# Altium PCB PCB1_DIO.PcbDoc
Units mil, origin at the board's own origin, x right, y up, seen from the top; angles counter-clockwise.
Board outline 2795.28 x 2007.87 mil, 2 copper layers (Top Layer, Bottom Layer); 3 components, 36 nets, 151 pads, 0 vias.
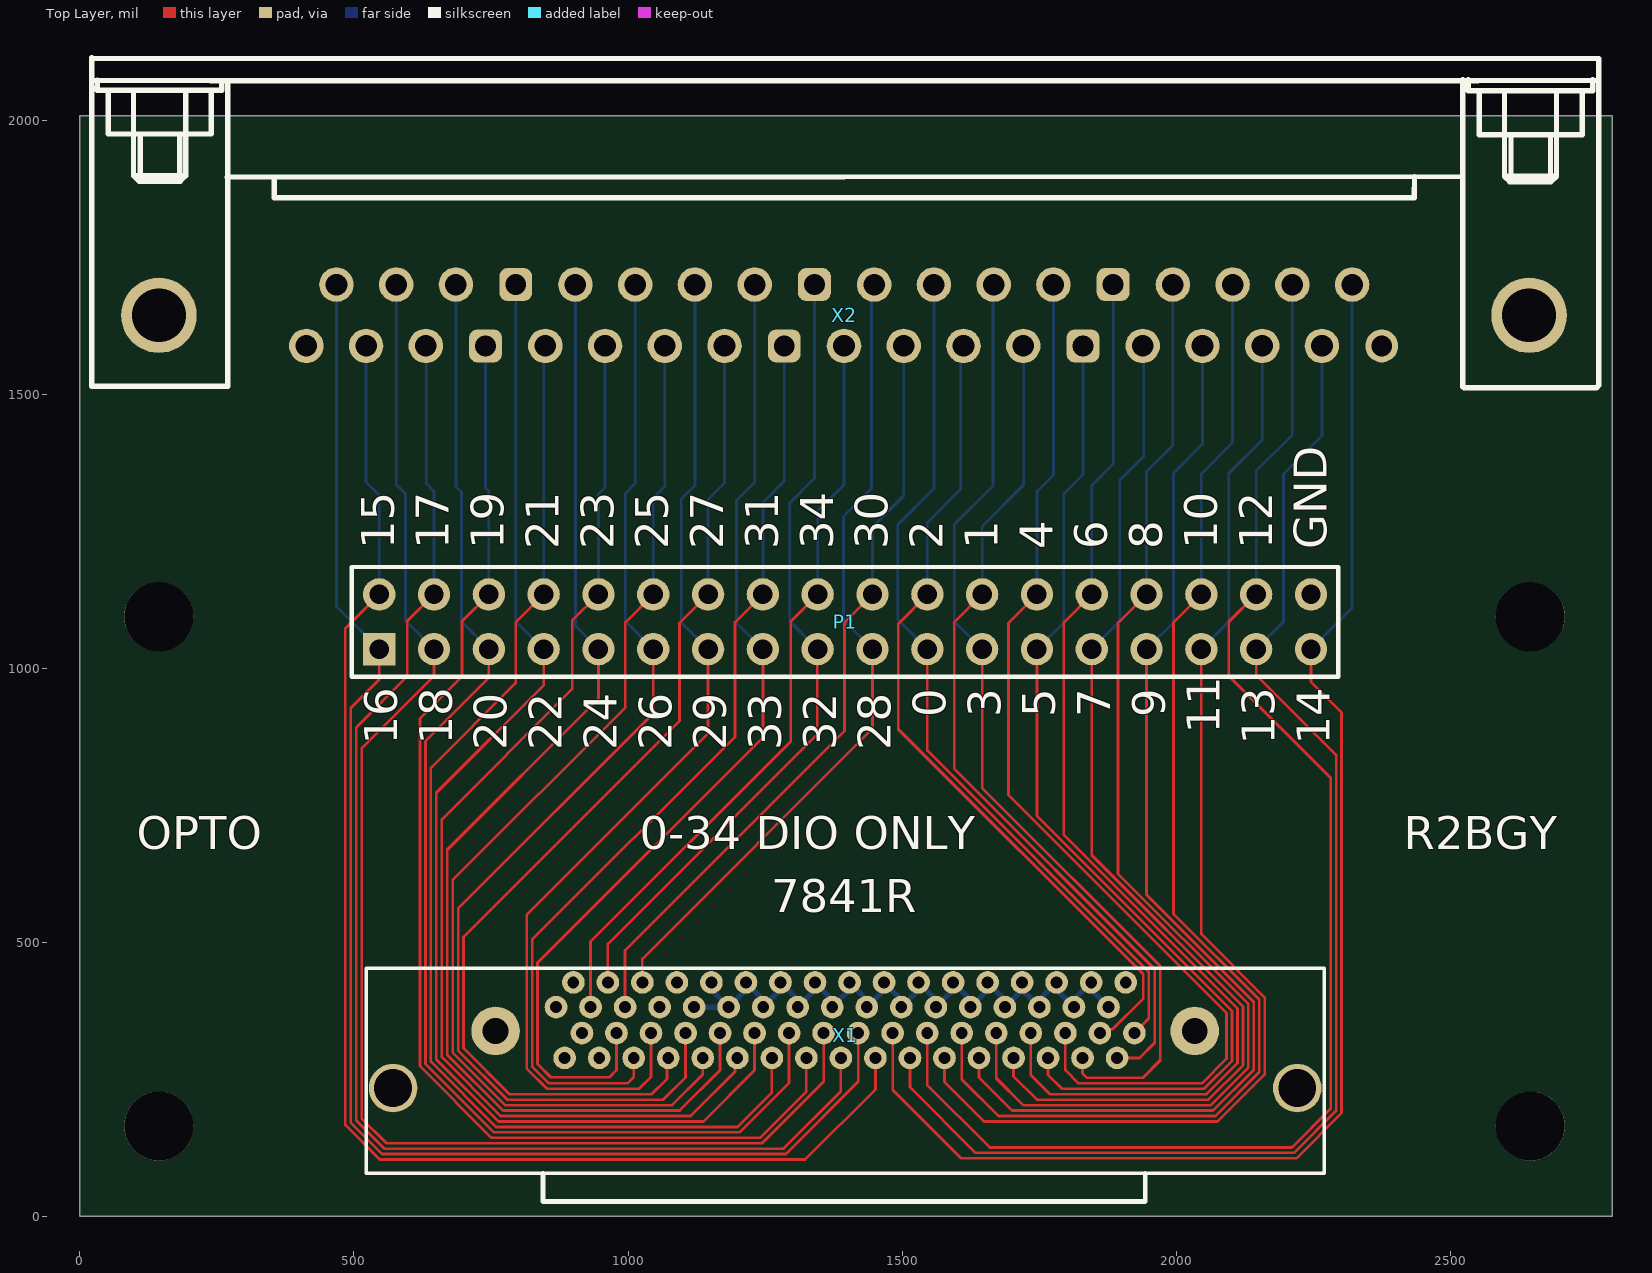
[diagram p0: Top Layer view]
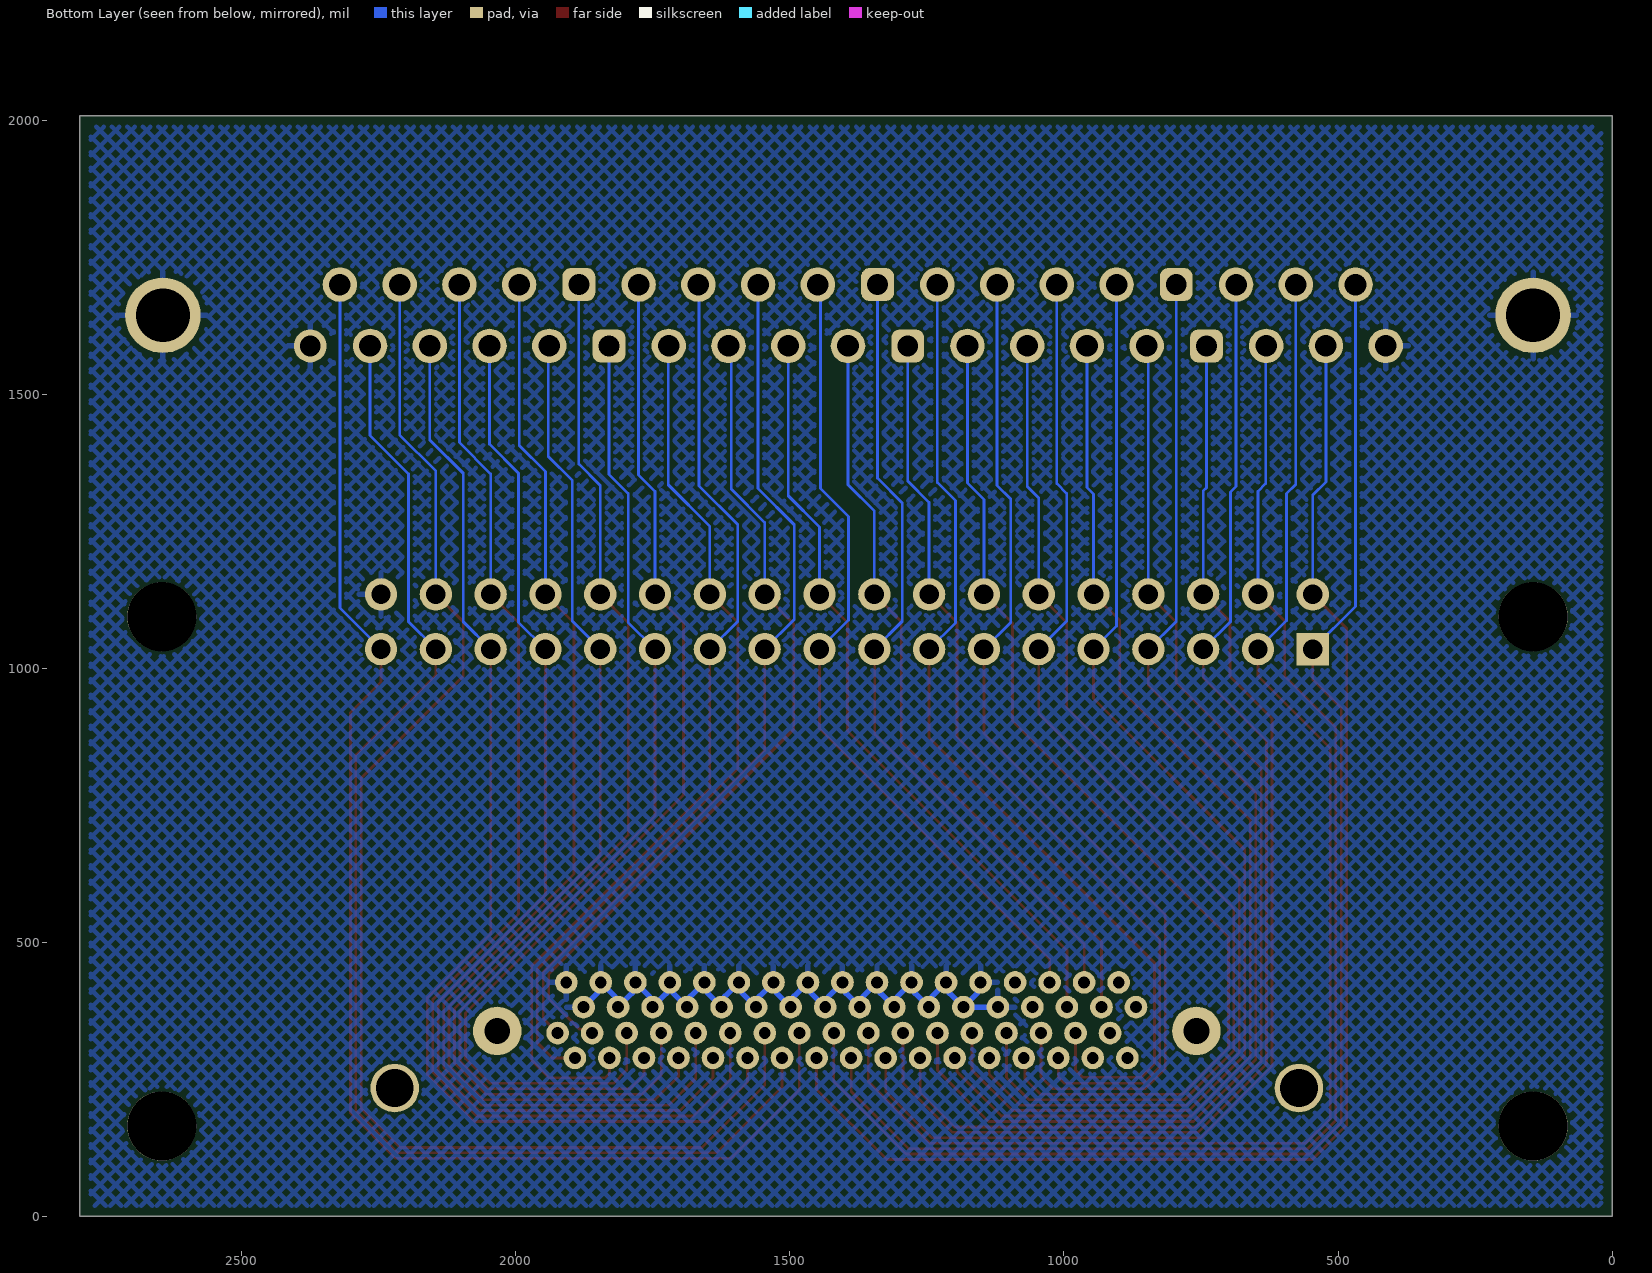
[diagram p1: Bottom Layer view, seen from below]

## Layer stack, top to bottom
Top Solder: solder mask 0.4, Solder Resist, Dk 3.5
Top Layer: signal copper 1.4
Dielectric 1: dielectric 12.6, FR-4, Dk 4.8
Bottom Layer: signal copper 1.4
Bottom Solder: solder mask 0.4, Solder Resist, Dk 3.5

## Board outline
0,0 0,2007.87 2795.28,2007.87 2795.28,0

## Design rules (kind name [scope] priority, off if disabled: settings)
Clearance [All] p1: gap=4.92 ignorepadtopadclearanceinfootprint=FALSE
PolygonConnect [All] p1: connectstyle=Relief reliefconductorwidth=10 reliefentries=4 polygonreliefangle="90 Angle" airgapwidth=10
RoutingVias [All] p1: holewidth=28 width=50 viastyle="Through Hole" minholewidth=28 minwidth=50 maxholewidth=28 maxwidth=50
SolderMaskExpansion [All] p1: expansion=4 istentingtop=FALSE
Width [All] p1: maxlimit=10 minlimit=4.92 preferedwidth=10
30 further rules are at their usual default settings.

## Classes and differential pairs
component class Sheet1_DIO: P1 X1

## Components (designator, comment, footprint, x,y, rotation, side; value= is the part's Value field where it differs from the comment)
P1 "Header 18X2" HDR2X18 546,1035 r0 top
X1 "FPGA_connector" FPGA 571.39,234.24 r0 top
X2 "CHEAP_CON_37_MALE" CHEAP_CONN_MALE 2644.01,1644.24 r180 top

## Footprints (in the part's own frame and the unit in brackets; to place one, negate y for a bottom-side part, rotate by r counter-clockwise, add the part's x,y. Pads: shape width x height; smd on the part's side, far side on the other; paste and mask are expansions set on the pad)
CHEAP_CONN_MALE [mm] "CHEAP_CONN_MALE"
  round 1.524 hole 0.965: 1(6.833,1.422)
  round 1.6 hole 1: 2(9.601,1.422) 3(12.37,1.422) 4(15.138,1.422) 5(17.907,1.422) 7(23.444,1.422) 8(26.213,1.422) 9(28.981,1.422) 10(31.75,1.422) 12(37.287,1.422) 13(40.056,1.422) 14(42.824,1.422) 15(45.593,1.422) 17(51.13,1.422) 18(53.899,1.422) 19(56.667,1.422) 20(8.204,-1.422) 21(10.973,-1.422) 22(13.741,-1.422) 23(16.51,-1.422) 25(22.047,-1.422) 26(24.816,-1.422) 27(27.584,-1.422) 28(30.353,-1.422) 30(35.89,-1.422) 31(38.659,-1.422) 32(41.427,-1.422) 33(44.196,-1.422) 35(49.733,-1.422) 36(52.502,-1.422) 37(55.27,-1.422)
  rrect50% 1.524x1.524 hole 0.965: 6(20.676,1.422) 11(34.519,1.422) 16(48.362,1.422) 24(19.279,-1.422) 29(33.122,-1.422) 34(46.965,-1.422)
  round 3.5 hole 2.5: 38(63.5,0) 39(0,0)
  silkscreen extent -3.22,-11.92 66.61,3.36
FPGA [mm] "FPGA Connector"
  round 1.05 hole 0.55: 1(33.95,4.9) 2(33.15,3.75) 3(32.35,4.9) 4(31.55,3.75) 5(30.75,4.9) 6(29.95,3.75) 7(29.15,4.9) 8(28.35,3.75) 9(27.55,4.9) 10(26.75,3.75) 11(25.95,4.9) 12(25.15,3.75) 13(24.35,4.9) 14(23.55,3.75) 15(22.75,4.9) 16(21.95,3.75) 17(21.15,4.9) 18(20.35,3.75) 19(19.55,4.9) 20(18.75,3.75) 21(17.95,4.9) 22(17.15,3.75) 23(16.35,4.9) 24(15.55,3.75) 25(14.75,4.9) 26(13.95,3.75) 27(13.15,4.9) 28(12.35,3.75) 29(11.55,4.9) 30(10.75,3.75) 31(9.95,4.9) 32(9.15,3.75) 33(8.35,4.9) 34(7.55,3.75) 35(34.35,2.55) 36(33.55,1.4) 37(32.75,2.55) 38(31.95,1.4) 39(31.15,2.55) 40(30.35,1.4) 41(29.55,2.55) 42(28.75,1.4) 43(27.95,2.55) 44(27.15,1.4) 45(26.35,2.55) 46(25.55,1.4) 47(24.75,2.55) 48(23.95,1.4) 49(23.15,2.55) 50(22.35,1.4) 51(21.55,2.55) 52(20.75,1.4) 53(19.95,2.55) 54(19.15,1.4) 55(18.35,2.55) 56(17.55,1.4) 57(16.75,2.55) 58(15.95,1.4) 59(15.15,2.55) 60(14.35,1.4) 61(13.55,2.55) 62(12.75,1.4) 63(11.95,2.55) 64(11.15,1.4) 65(10.35,2.55) 66(9.55,1.4) 67(8.75,2.55) 68(7.95,1.4)
  round 2.25 hole 1.2: 69(37.15,2.65) 71(4.75,2.65)
  round 2.25 hole 1.75: 70(41.9,0) 72(0,0)
  silkscreen extent -1.25,-5.25 43.15,5.55
HDR2X18 [mm] "Connector; Header; 18x2 Position"
  rect 1.5x1.5 hole 0.9: 1(0,0)
  round 1.5 hole 0.9: 2(0,2.54) 3(2.54,0) 4(2.54,2.54) 5(5.08,0) 6(5.08,2.54) 7(7.62,0) 8(7.62,2.54) 9(10.16,0) 10(10.16,2.54) 11(12.7,0) 12(12.7,2.54) 13(15.24,0) 14(15.24,2.54) 15(17.78,0) 16(17.78,2.54) 17(20.32,0) 18(20.32,2.54) 19(22.86,0) 20(22.86,2.54) 21(25.4,0) 22(25.4,2.54) 23(27.94,0) 24(27.94,2.54) 25(30.48,0) 26(30.48,2.54) 27(33.02,0) 28(33.02,2.54) 29(35.56,0) 30(35.56,2.54) 31(38.1,0) 32(38.1,2.54) 33(40.64,0) 34(40.64,2.54) 35(43.18,0) 36(43.18,2.54)
  silkscreen extent -1.27,-1.27 44.45,3.81

## Part data
P1: "Header, 18-Pin, Dual row", LatestRevisionDate=17-Jul-2002, LatestRevisionNote="Re-released for DXP Platform.", Publisher="Altium Limited"
X1: library part FPGA_Connector

## Free pads (board coordinates)
  round 125.98 hole 125.98 unplated: 0(144,164.91) 0(144,1094.24) 0(2645.97,164.91) 0(2645.97,1094.24)

## Nets (pads, with @x,y where several pads share a name; then routed paths per layer and width w, separated by ;. In a path a pad name is that pad's centre, name@x,y a point inside that pad or via, vN(x,y) a via of type N, cw(c..) or ccw(c..) an arc to the next point about the centre after c; other vN are vias at no path point)
DGND: P1.36 X1.1 X1.2 X1.3 X1.4 X1.5 X1.6 X1.7 X1.8 X1.9 X1.10 X1.11 X1.12 X1.13 X1.14 X1.15 X1.16 X1.17 X1.18 X1.19 X1.20 X1.21 X1.22 X1.23 X1.24 X1.25 X1.26 X2.1 X2.19 X2.38 X2.39 | length 1404.4
  Bottom Layer w10: X1.26 X1.24 ; X1.25 1158.09,421.15 1158.09,407.37 X1.24 ; X1.2 1851.01,407.37 1851.01,421.15 X1.3 1819.51,401.65 1819.51,387.87 X1.4 1788.01,407.37 1788.01,421.15 X1.5 1756.52,401.65 1756.52,387.87 X1.6 1725.02,407.37 1725.02,421.15 X1.7 1713.03,421.15 1713.03,407.37 X1.8 1681.53,387.87 1681.53,401.65 X1.9 1650.04,421.15 1650.04,407.37 X1.10 1618.54,387.87 1618.54,401.65 X1.11 1587.04,421.15 1587.04,407.37 X1.12 1555.55,387.87 1555.55,401.65 X1.13 1524.05,421.15 1524.05,407.37 X1.14 1492.56,387.87 1492.56,401.65 X1.15 1461.06,421.15 1461.06,407.37 X1.16 1429.56,387.87 1429.56,401.65 X1.17 1398.07,421.15 1398.07,407.37 X1.18 1366.57,387.87 1366.57,401.65 X1.19 1335.08,421.15 1335.08,407.37 X1.20 1303.58,387.87 1303.58,401.65 X1.21 1272.08,421.15 1272.08,407.37 X1.22 1240.59,387.87 1240.59,401.65 X1.23 1209.09,421.15 1209.09,407.37 X1.24
DIO0: P1.21 X1.35 X2.27 | length 1593.5
  Top Layer w5: P1.21 1546,850.24 1950,446.24 1950,360.88 X1.35
  Bottom Layer w5: P1.21 1492,1089 1492,1262 1558.01,1328.01 X2.27
DIO1: P1.24 X1.36 X2.7 | length 1556.1
  Top Layer w5: P1.24 1595,1084 1595,817 1961,451 1961,317 1933.36,289.36 X1.36
  Bottom Layer w5: P1.24 1646,1259 1722,1335 1722,1587.25 X2.7
DIO2: P1.22 X1.37 X2.8 | length 1529.9
  Top Layer w5: P1.22@1546.5,1134.5 1493,1081 1493,889 1940.08,441.92 1940.08,398.08 1883.58,341.58 1867.71,341.58 X1.37
  Bottom Layer w5: P1.22 1546,1266 1607,1327 1607,1583.23 X2.8
DIO3: P1.23 X1.38 X2.26 | length 1787.6
  Top Layer w5: P1.23 1646,782 1971,457 1971,285 1939,253 1837,253 1829.26,260.74 X1.38
  Bottom Layer w5: P1.23 1595,1086 1595,1262 1666,1333 1666,1699.23 X2.26
DIO4: P1.26 X1.39 X2.25 | length 2001.5
  Top Layer w5: P1.26 1694,1083 1694,768.91 2092,370.91 2092,288 2047,243 1821.77,243 1797.77,267 X1.39
  Bottom Layer w5: P1.26 1746,1323 1776.01,1353.01 X2.25
DIO5: P1.25 X1.40 X2.6 | length 1884.8
  Top Layer w5: P1.25 1746,730.94 2101.92,375.02 2101.92,283.89 2051.11,233.08 1791.42,233.08 1766.27,258.23 X1.40
  Bottom Layer w5: P1.25 1795,1084 1795,1319 1830.01,1354.01 X2.6
DIO6: P1.28 X1.41 X2.24 | length 2080.6
  Top Layer w5: X1.41 1734.77,258.23 1770,223 1943,223 1943.16,223.16 2055.22,223.16 2111.84,279.78 2111.84,379.13 1795,695.97 1795,1084 P1.28
  Bottom Layer w5: P1.28 1846,1334 1885.01,1373.01 X2.24
DIO7: P1.27 X1.42 X2.5 | length 1962.7
  Top Layer w5: X1.42 1703.28,255.72 1745.92,213.08 2059.17,213.08 2121.76,275.67 2121.76,383.24 1846,659 P1.27
  Bottom Layer w5: P1.27 1897,1086 1897,1343 1941,1387 1941,1586.25 X2.5
DIO8: P1.30 X1.43 X2.23 | length 2159.5
  Top Layer w5: X1.43 1671.78,252.22 1720.84,203.16 2063.28,203.16 2131.69,271.56 2131.69,387.35 1894,625.03 1894,1083 P1.30
  Bottom Layer w5: P1.30 1946,1359 1994.01,1407.01 X2.23
DIO9: P1.29 X1.44 X2.4 | length 2036.8
  Top Layer w5: X1.44 1640.29,253.71 1700.76,193.24 2067.39,193.24 2141.61,267.45 2141.61,391.46 1968.03,565.03 1946,587.06 P1.29
  Bottom Layer w5: P1.29 1995,1084 1995,1356 2048.01,1409.01 X2.4
DIO10: P1.32 X1.45 X2.22 | length 2234.5
  Top Layer w5: X1.45 1608.79,250.21 1675.69,183.31 2071.5,183.31 2151.53,263.34 2151.53,395.56 1995,552.09 1995,1084 P1.32
  Bottom Layer w5: P1.32 2046,1355 2103.01,1412.01 X2.22
DIO11: P1.31 X1.46 X2.3 | length 2116.1
  Top Layer w5: X1.46 1577.29,245.71 1649.61,173.39 2075.61,173.39 2161.45,259.23 2161.45,399.67 2046,515.12 P1.31
  Bottom Layer w5: P1.31 2096,1085 2096,1356 2157.01,1417.01 X2.3
DIO12: P1.34 X1.47 X2.21 | length 2535.7
  Top Layer w5: X1.47 1545.8,240.2 1660,126 2211,126 2282,197 2282,800 2096,986 2096,1085 P1.34
  Bottom Layer w5: P1.34 2146,1360 2212.01,1426.01 X2.21
DIO13: P1.33 X1.48 X2.2 | length 2418
  Top Layer w5: X1.48 1514.3,236 1634.22,116.08 2215.11,116.08 2291.92,192.89 2291.92,842.08 2146,988 P1.33
  Bottom Layer w5: P1.33 2196,1085 2196,1355 2266.01,1425.01 X2.2
DIO14: P1.35 X1.49 X2.20 | length 2574.1
  Top Layer w5: X1.49 1482.8,231.2 1607.84,106.16 2219.22,106.16 2301.84,188.78 2301.84,919.16 2246,975 P1.35
  Bottom Layer w5: P1.35 2321.01,1110.01 X2.20
DIO15: P1.2 X1.50 X2.18 | length 2560.6
  Top Layer w5: P1.2 484.24,1073.24 484.24,166.67 547.04,103.87 1323.17,103.87 1451.31,232 X1.50
  Bottom Layer w5: X2.18 522,1340 546,1316 P1.2
DIO16: P1.1 X1.51 X2.37 | length 2676
  Top Layer w5: P1.1 546,980 494.16,928.16 494.16,170.78 551.15,113.79 1287.82,113.79 1419.81,245.78 X1.51
  Bottom Layer w5: X2.37 468,1113 P1.1
DIO17: P1.4 X1.52 X2.17 | length 2488.1
  Top Layer w5: P1.4 597,1086 597,985 504.08,892.08 504.08,174.89 555.26,123.71 1283.71,123.71 1388,228 1388,289.04 X1.52
  Bottom Layer w5: X2.17 632,1587.25 632,1337 646,1323 P1.4
DIO18: P1.3 X1.53 X2.36 | length 2601.4
  Top Layer w5: P1.3 646,986 514,854 514,179 559.37,133.63 1244.66,133.63 1356.82,245.79 X1.53
  Bottom Layer w5: X2.36 577,1336 594,1319 594,1087 P1.3
DIO19: P1.6 X1.54 X2.16 | length 2223.7
  Top Layer w5: P1.6 697,1086 697,985 620.31,908.31 620.31,274.44 751.2,143.55 1240.55,143.55 1325.32,228.32 X1.54
  Bottom Layer w5: X2.16 740.01,1329.52 746,1323.53 P1.6
DIO20: P1.5 X1.55 X2.35 | length 2338.1
  Top Layer w5: P1.5 746,983 630.24,867.24 630.24,278.55 755.31,153.47 1203.5,153.47 1293.83,243.8 X1.55
  Bottom Layer w5: X2.35 686.01,1331.99 696,1322 696,1085 P1.5
DIO21: P1.8 X1.56 X2.15 | length 2152.8
  Top Layer w5: P1.8 795,1084 795,973 640.16,818.16 640.16,282.66 759.42,163.39 1199.39,163.39 1262.33,226.33 X1.56
  Bottom Layer w5: P1.8 846,1585.23 X2.15
DIO22: P1.7 X1.57 X2.34 | length 2250
  Top Layer w5: P1.7 846,969 650.08,773.08 650.08,286.77 763.53,173.31 1137.31,173.31 1230.84,266.84 X1.57
  Bottom Layer w5: X2.34 795.01,1085.99 P1.7
DIO23: P1.10 X1.58 X2.14 | length 2060.8
  Top Layer w5: P1.10 898,1087 898,962 660.24,724.24 660.24,290.64 767.64,183.24 1114.24,183.24 1195.11,264.12 1195.11,285.13 X1.58
  Bottom Layer w5: P1.10 946,1318 958.01,1330.01 X2.14
DIO24: P1.9 X1.59 X2.33 | length 2175.2
  Top Layer w5: P1.9 946,945 670.16,669.16 670.16,294.75 771.75,193.16 1094.16,193.16 1167.84,266.84 X1.59
  Bottom Layer w5: X2.33 904.01,1076.99 P1.9
DIO25: P1.12 X1.60 X2.13 | length 1998.9
  Top Layer w5: P1.12 995,1084 995,929 680.08,614.08 680.08,298.86 775.86,203.08 1080.08,203.08 1136.35,259.35 X1.60
  Bottom Layer w5: P1.12 1046,1311 1067.01,1332.01 X2.13
DIO26: P1.11 X1.61 X2.32 | length 2123.1
  Top Layer w5: P1.11 1046,918 690,562 690,302.97 779.97,213 1064,213 1104.85,253.85 X1.61
  Bottom Layer w5: X2.32 1013.01,1337.01 995,1319 995,1086 P1.11
DIO27: P1.14 X1.62 X2.12 | length 1935.2
  Top Layer w5: X1.62 1071.11,287.11 1071.11,251.12 1043,223 784,223 699.92,307.08 699.92,509.92 1094,904 1094,1083 P1.14
  Bottom Layer w5: P1.14 1146,1308 1176.01,1338.01 X2.12
DIO28: P1.19 X1.29 X2.28 | length 1492.2
  Top Layer w5: X1.29 1026.11,470.11 1446,890 P1.19
  Bottom Layer w5: P1.19 1393,1088 1393,1277 1444,1328 1444,1695.23 X2.28
DIO29: P1.13 X1.63 X2.31 | length 1929
  Top Layer w5: X1.63 1041.86,254.86 1020,233 866,233 865.92,233.08 851.89,233.08 815.08,269.89 815.08,283.92 815,284 815,550 1146,881 P1.13
  Bottom Layer w5: X2.31 1122.01,1334.01 1097,1309 1097,1084 P1.13
DIO30: P1.20 X1.30 X2.9 | length 1416.9
  Top Layer w5: X1.30 994.62,485.62 1395,886 1395,1084 P1.20
  Bottom Layer w5: P1.20 1446,1258 1503,1315 X2.9
DIO31: P1.16 X1.64 X2.11 | length 1742.7
  Top Layer w5: X1.64 1010.36,254.36 999,243 856,243 825,274 825,505 1195,875 1195,1084 P1.16
  Bottom Layer w5: P1.16 1246,1303 1285.01,1342.01 X2.11
DIO32: P1.17 X1.31 X2.29 | length 1471
  Top Layer w5: X1.31 963.12,497.12 1345,879 P1.17@1345,1035
  Bottom Layer w5: X2.29 1340.01,1347.01 1295,1302 1295,1086 P1.17
DIO33: P1.15 X1.65 X2.30 | length 1852.8
  Top Layer w5: X1.65 978.87,267 965.87,254 859.03,254 835,278.03 835,463 1246,874 P1.15
  Bottom Layer w5: X2.30 1231.01,1339.01 1198,1306 1198,1083 P1.15
DIO34: P1.18 X1.32 X2.10 | length 1397.9
  Top Layer w5: X1.32 931.62,501.62 1297,867 1297,1086 P1.18
  Bottom Layer w5: P1.18 1346,1287 1394.01,1335.01 X2.10
pads on no net: X1.27 X1.28 X1.33 X1.34 X1.66 X1.67 X1.68 X1.69 X1.70 X1.71 X1.72

## Polygon pours and split planes (outlines as drawn)
DGND on Bottom Layer "Top Overlay-No Net" (hatched 45Degree grid 20 track 8, remove dead copper, pour order 0): 19.68,19.68 19.68,1988.19 2775.59,1988.19 2775.59,19.68

## Silkscreen, mask and mechanical layers (free items; w line width, h text height)
Top Overlay:
  text "15" at 572.99,1217.03 h60 r90
  text "17" at 673.11,1217.03 h60 r90
  text "19" at 773.23,1217.03 h60 r90
  text "21" at 873.34,1217.03 h60 r90
  text "23" at 973.46,1217.03 h60 r90
  text "25" at 1073.58,1217.03 h60 r90
  text "27" at 1173.7,1217.03 h60 r90
  text "31" at 1273.81,1217.03 h60 r90
  text "34" at 1373.93,1217.03 h60 r90
  text "30" at 1474.05,1217.03 h60 r90
  text "2" at 1574.17,1217.03 h60 r90
  text "1" at 1674.28,1217.03 h60 r90
  text "4" at 1774.4,1217.03 h60 r90
  text "6" at 1874.52,1217.03 h60 r90
  text "8" at 1974.64,1217.03 h60 r90
  text "10" at 2074.75,1217.03 h60 r90
  text "12" at 2174.87,1217.03 h60 r90
  text "GND" at 2274.99,1217.03 h60 r90
  text "0" at 1579.58,911 h60 r90
  text "3" at 1679.64,911 h60 r90
  text "5" at 1779.7,911 h60 r90
  text "7" at 1879.75,911 h60 r90
  text "9" at 1979.81,911 h60 r90
  text "11" at 2079.87,881.01 h60 r90
  text "16" at 578.99,861.01 h60 r90
  text "18" at 679.05,861.01 h60 r90
  text "13" at 2179.93,861.01 h60 r90
  text "14" at 2279.99,861.01 h60 r90
  text "20" at 779.11,851.02 h60 r90
  text "22" at 879.17,851.02 h60 r90
  text "24" at 979.23,851.02 h60 r90
  text "26" at 1079.28,851.02 h60 r90
  text "29" at 1179.34,851.02 h60 r90
  text "33" at 1279.4,851.02 h60 r90
  text "32" at 1379.46,851.02 h60 r90
  text "28" at 1479.52,851.02 h60 r90
  text "OPTO" at 104.04,670.01 h60
  text "0-34 DIO ONLY" at 1021.12,670.01 h60
  text "R2BGY" at 2415.05,670.01 h60
  text "7841R" at 1261.04,555.01 h60
Mechanical 1:
  the board outline again, w10